# Altium PCB PCB_ESP32-IOT-Shield-copy_2025-10-18.pcbdoc
Units mm, origin at the board's own origin, x right, y up, seen from the top; angles counter-clockwise.
Board outline 119.75 x 135.63 mm, 2 copper layers (Top Layer, Bottom Layer); 39 components, 65 nets, 134 pads, 0 vias.
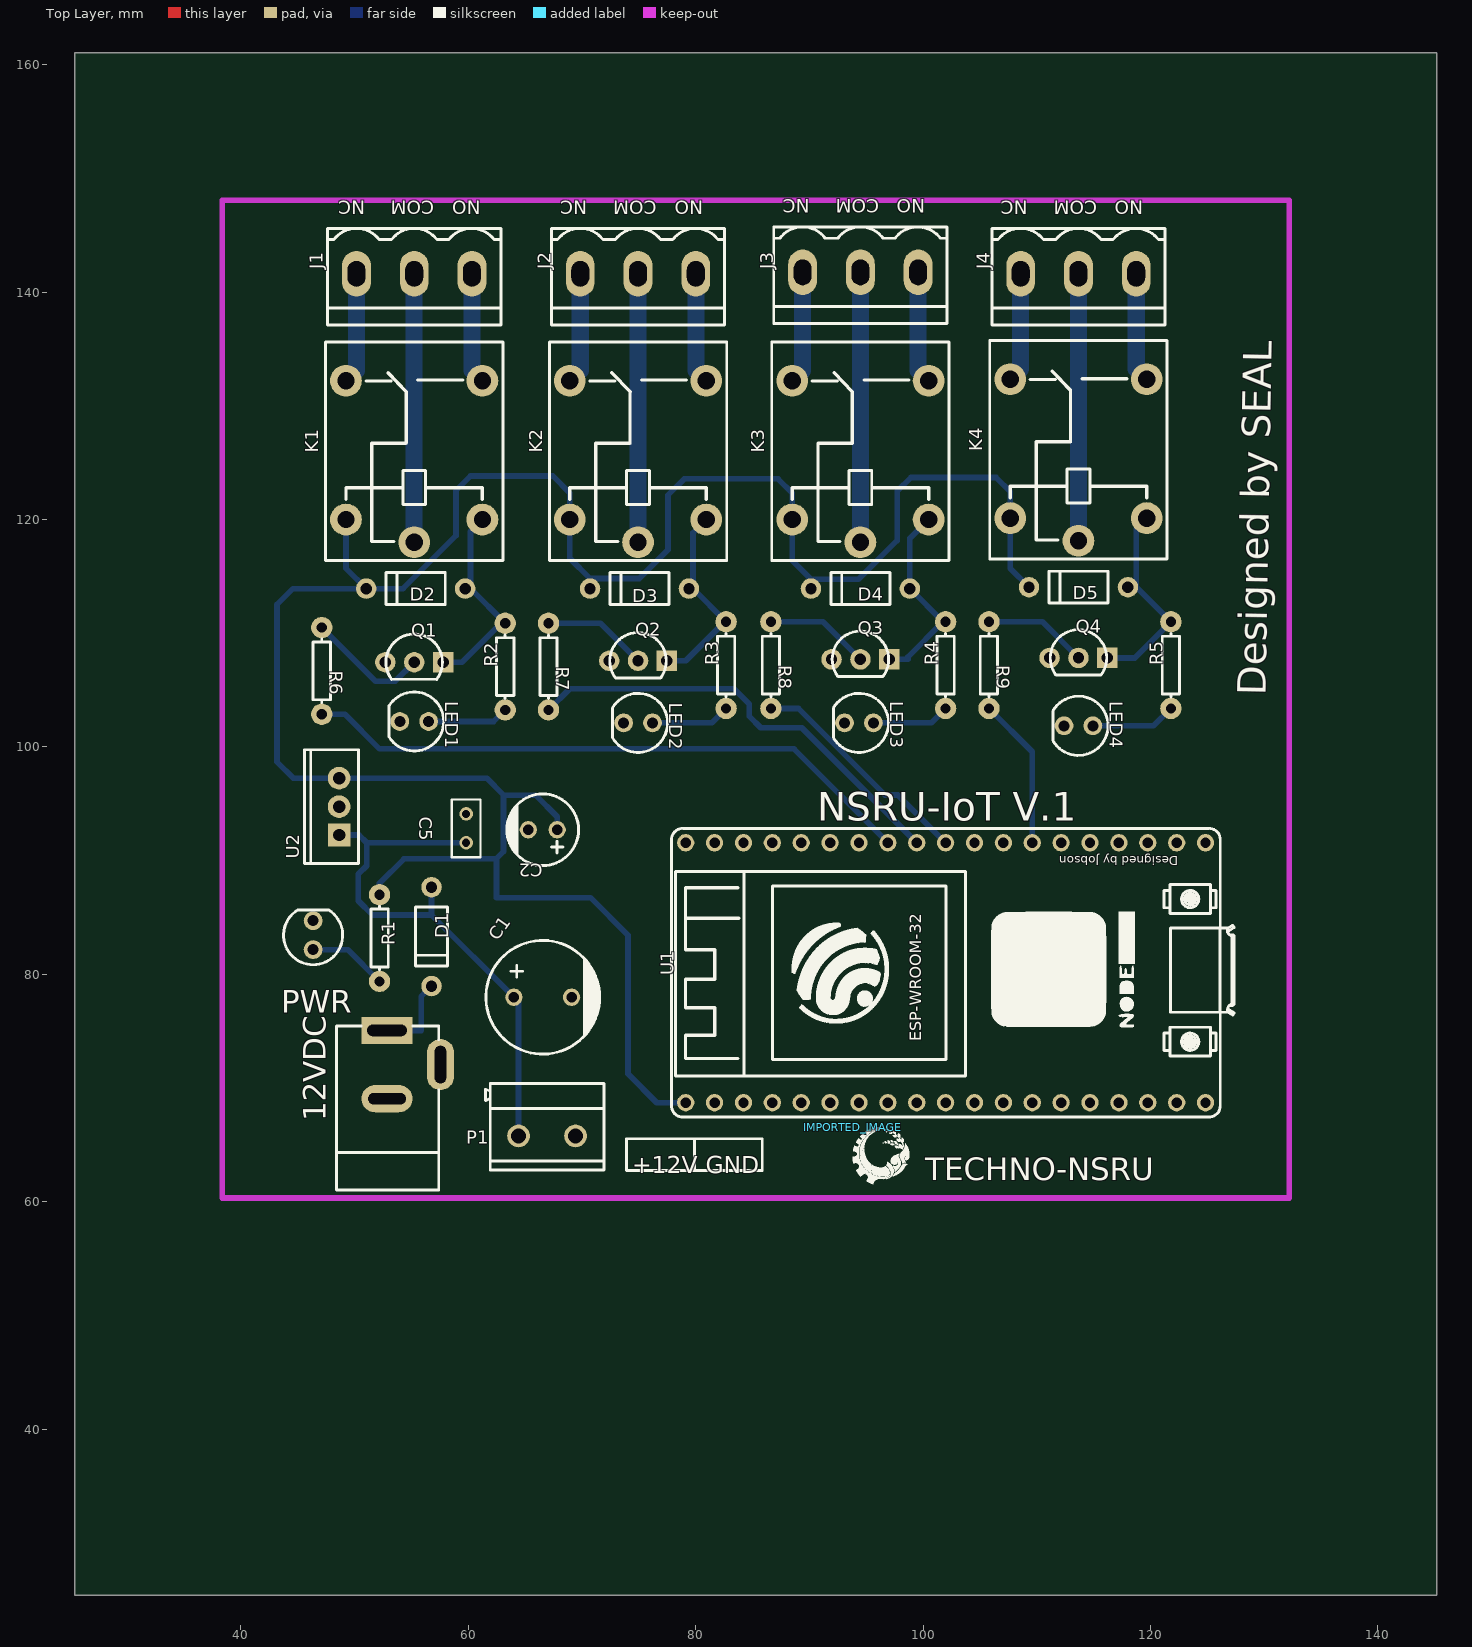
[diagram p0: Top Layer view]
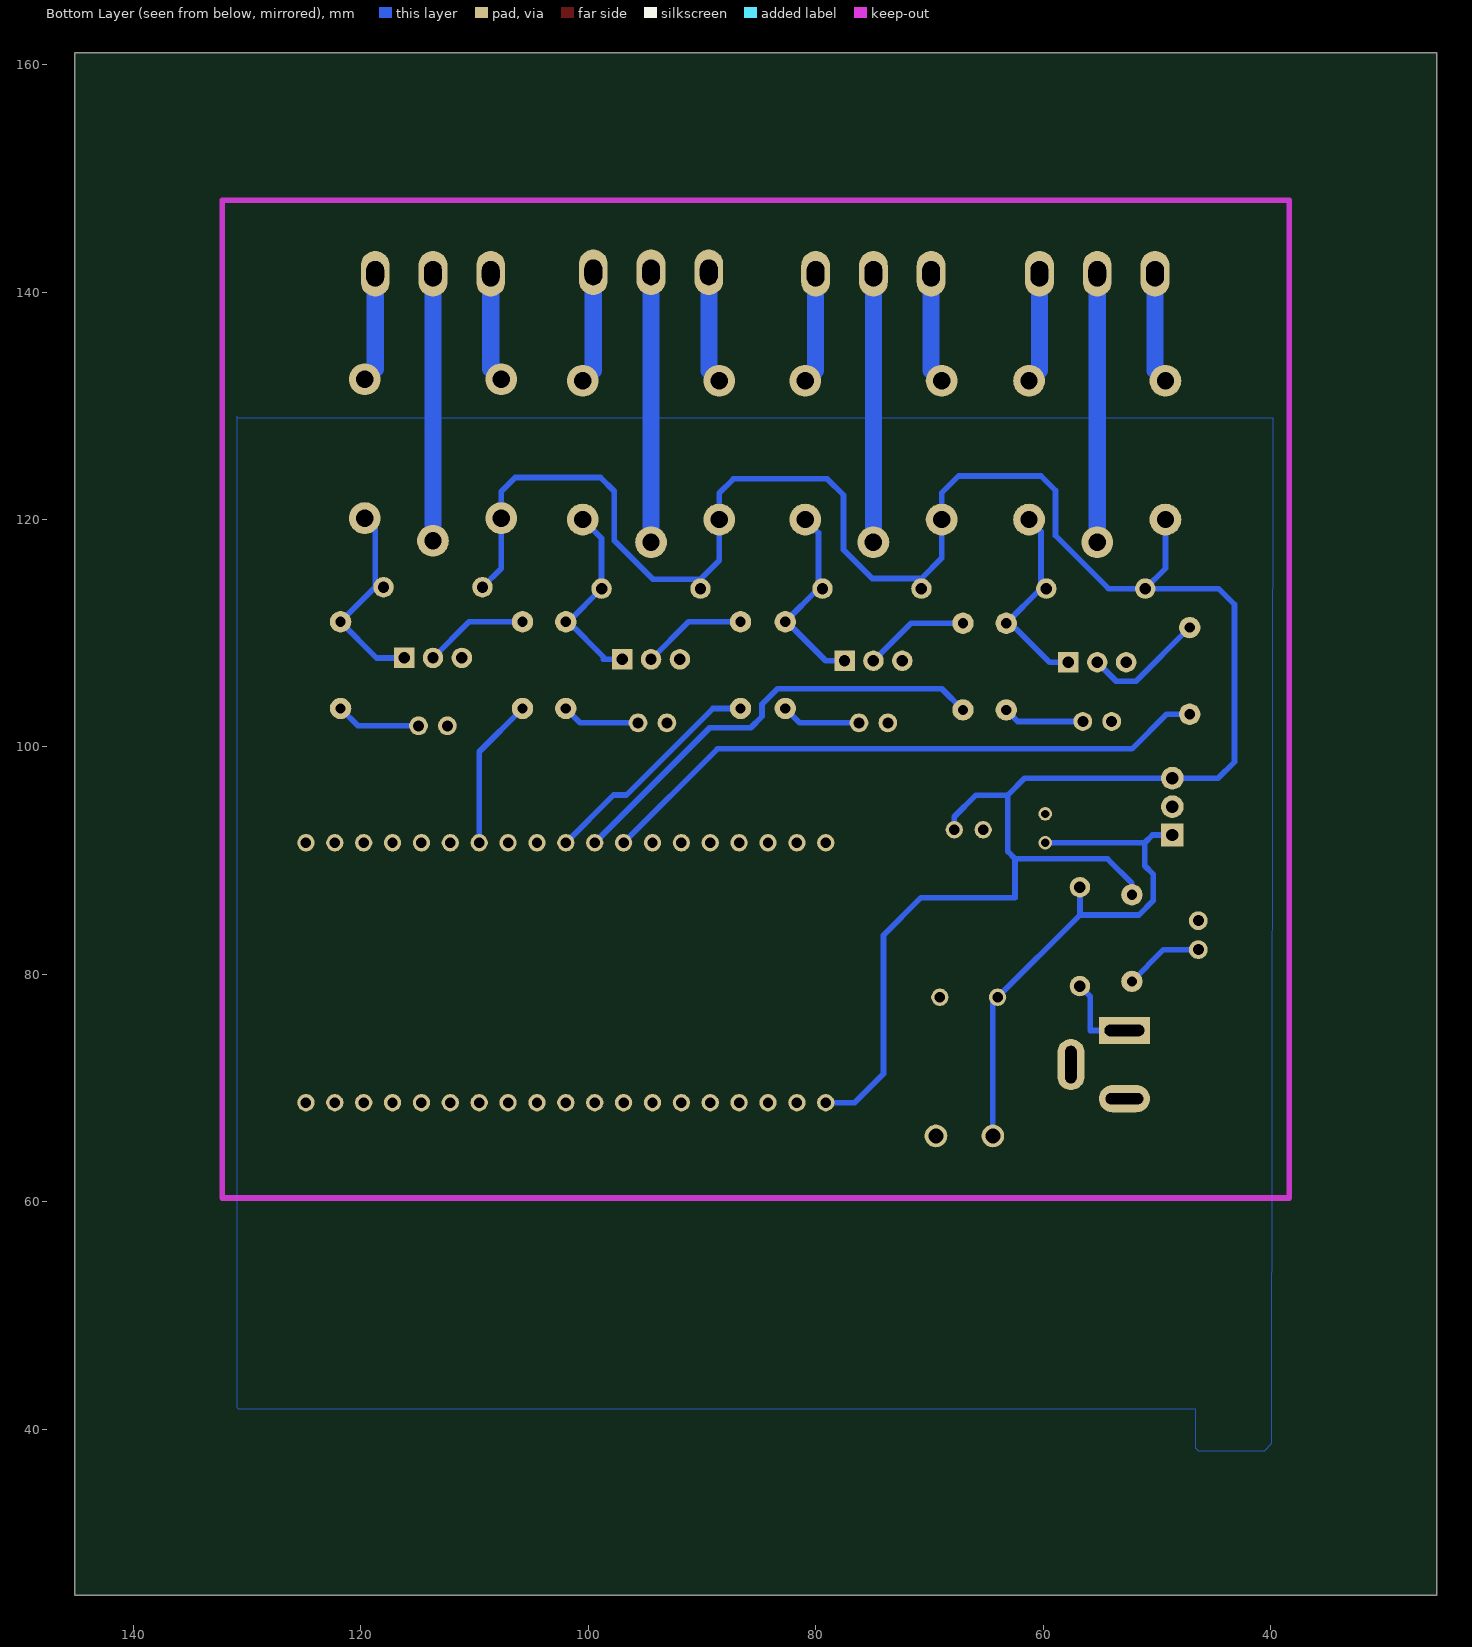
[diagram p1: Bottom Layer view, seen from below]

## Layer stack, top to bottom
Top Layer: signal copper (thickness not stored)
Dielectric: dielectric 0.32, FR-4, Dk 4.8
Bottom Layer: signal copper (thickness not stored)

## Board outline
145.153,25.4 25.4,25.4 25.4,161.032 145.153,161.032

## Components (designator, comment, footprint, x,y, rotation, side; value= is the part's Value field where it differs from the comment)
12VDC "POWER-JACK" JACK-POWER-SUPPLY 52.193,69.215 r270 top
C1 "2200u" CAP-D10.0×F5.0 66.544,77.978 r0 top
C2 "1u" CAP-D6.3×F2.5 66.544,92.71 r180 top
C5 "100n" RAD-0.1 59.813,92.837 r270 top
D1 "1N4007" DO-41_BD2.4-L4.7-P8.70-D0.9-RD 56.765,83.312 r90 top
D2 "1N4007" DO-41_BD2.4-L4.7-P8.70-D0.9-RD 55.368,113.919 r0 top
D3 "1N4007" DO-41_BD2.4-L4.7-P8.70-D0.9-RD 75.053,113.919 r0 top
D4 "1N4007" DO-41_BD2.4-L4.7-P8.70-D0.9-RD 94.484,113.919 r0 top
D5 "1N4007" DO-41_BD2.4-L4.7-P8.70-D0.9-RD 113.661,114.046 r0 top
IMPORTED_IMAGE "IMPORTED_IMAGE" IMPORTED_IMAGE 93.795,66.55 r0 top
J1 "SCREW TERMINAL 3P" SCREW_TERMINAL_5.08MM_3P 55.241,141.605 r180 top
J2 "SCREW TERMINAL 3P" SCREW_TERMINAL_5.08MM_3P 74.926,141.605 r180 top
J3 "SCREW TERMINAL 3P" SCREW_TERMINAL_5.08MM_3P 94.484,141.732 r180 top
J4 "SCREW TERMINAL 3P" SCREW_TERMINAL_5.08MM_3P 113.661,141.605 r180 top
K1 "SRD-12VDC-SD-C" RELAY-TH_SRD-XXVDC-SD-C 55.241,125.095 r90 top
K2 "SRD-12VDC-SD-C" RELAY-TH_SRD-XXVDC-SD-C 74.926,125.095 r90 top
K3 "SRD-12VDC-SD-C" RELAY-TH_SRD-XXVDC-SD-C 94.484,125.095 r90 top
K4 "SRD-12VDC-SD-C" RELAY-TH_SRD-XXVDC-SD-C 113.661,125.222 r90 top
LED1 "LED-TH-5mm_R" LED-TH_BD5.0_RED 55.241,102.235 r270 top
LED2 "LED-TH-5mm_R" LED-TH_BD5.0_RED 74.926,102.108 r270 top
LED3 "LED-TH-5mm_R" LED-TH_BD5.0_RED 94.357,102.108 r270 top
LED4 "LED-TH-5mm_R" LED-TH_BD5.0_RED 113.661,101.854 r270 top
P1 "CONN-TH_2P-P5.00" CONN-TH_2P-P5.00 66.925,65.786 r0 top
PWR "LED-TH-5mm_G" LED-TH_BD5.0_GREEN 46.351,83.439 r180 top
Q1 "2N2222A" TO-92-3_L4.8-W3.7-P2.54-R 55.241,107.442 r0 top
Q2 "2N2222A" TO-92-3_L4.8-W3.7-P2.54-R 74.926,107.569 r0 top
Q3 "2N2222A" TO-92-3_L4.8-W3.7-P2.54-R 94.484,107.696 r0 top
Q4 "2N2222A" TO-92-3_L4.8-W3.7-P2.54-R 113.661,107.823 r0 top
R1 "150" R_AXIAL-0.3 52.193,83.185 r90 top
R2 "220" R_AXIAL-0.3 63.242,107.061 r90 top
R3 "220" R_AXIAL-0.3 82.673,107.188 r90 top
R4 "220" R_AXIAL-0.3 101.977,107.188 r90 top
R5 "220" R_AXIAL-0.3 121.789,107.188 r90 top
R6 "1k" R_AXIAL-0.3 47.113,106.68 r270 top
R7 "1k" R_AXIAL-0.3 67.052,107.061 r270 top
R8 "1k" R_AXIAL-0.3 86.61,107.188 r270 top
R9 "1k" R_AXIAL-0.3 105.787,107.188 r270 top
U1 "NODEMCU-32SLUA" COMM-TH_NODEMCU-32SLUA 101.977,80.137 r90 top
U2 "LM7805CV" LM7805CV 48.637,94.742 r90 top

## Footprints (in the part's own frame and the unit in brackets; to place one, negate y for a bottom-side part, rotate by r counter-clockwise, add the part's x,y. Pads: shape width x height; smd on the part's side, far side on the other; paste and mask are expansions set on the pad)
CAP-D6.3×F2.5 [mil]
  round 60 hole 36 paste+0 mask+4: 1(-50,0) 2(50,0)
  silkscreen extent -124,-124 125,124
CAP-D10.0×F5.0 [mil]
  round 60 hole 36 paste+0 mask+4: 1(-100,0) 2(100,0)
  silkscreen extent -197,-197 200,197
COMM-TH_NODEMCU-32SLUA [mil]
  round 60 hole 36 paste+0 mask+1.97: 1(-450,-900) 2(-450,-800) 3(-450,-700) 4(-450,-600) 5(-450,-500) 6(-450,-400) 7(-450,-300) 8(-450,-200) 9(-450,-100) 10(-450,0) 11(-450,100) 12(-450,200) 13(-450,300) 14(-450,400) 15(-450,500) 16(-450,600) 17(-450,700) 18(-450,800) 19(-450,900) 20(450,-900) 21(450,-800) 22(450,-700) 23(450,-600) 24(450,-500) 25(450,-400) 26(450,-300) 27(450,-200) 28(450,-100) 29(450,0) 30(450,100) 31(450,200) 32(450,300) 33(450,400) 34(450,500) 35(450,600) 36(450,700) 37(450,800) 38(450,900)
  silkscreen extent -500,-999 500,949
CONN-TH_2P-P5.00 [mm]
  round 2 hole 1.3 paste+0 mask+0.051: 1(-2.504,0) 2(2.504,0)
  silkscreen extent -5.4,-3 5,4.6
DO-41_BD2.4-L4.7-P8.70-D0.9-RD [mm]
  round 1.8 hole 1 paste+0 mask+0.051: 1(-4.35,0) 2(4.35,0)
  silkscreen extent -2.6,-1.4 2.6,1.4
IMPORTED_IMAGE [mm]
  silkscreen extent 0,-5 5,0
JACK-POWER-SUPPLY [mm]
  rect 2.4x4.5 hole 1 slot 3.5 at 90 deg paste+0 mask+0.051: 1(-5.843,0.656)
  oval 2.4x4.5 hole 1 slot 3.3 at 90 deg paste+0 mask+0.051: 2(0.157,0.656)
  oval 4.5x2.4 hole 1 slot 3.3 at 0 deg paste+0 mask+0.051: 3(-2.843,5.359)
  silkscreen extent -6.22,-3.8 8.19,5.21
LED-TH_BD5.0_GREEN [mil]
  round 65 hole 38 paste+0 mask+2: 1(0,50) 2(0,-50)
  silkscreen extent -102,-88 102,102
LED-TH_BD5.0_RED [mil]
  round 65 hole 38 paste+0 mask+2: 1(0,50) 2(0,-50)
  silkscreen extent -102,-88 102,102
LM7805CV [mm]
  rect 2x2 hole 1.082 paste+0 mask+0.051: 1(-2.5,0)
  round 2 hole 1.082 paste+0 mask+0.051: 2(0,0) 3(2.5,0)
  silkscreen extent -5,-1.69 5,3.04
R_AXIAL-0.3 [mil]
  round 74 hole 35.4 paste+0 mask+2: 1(-150,0) 2(150,0)
  silkscreen extent -110,-30 110,30
RAD-0.1 [mil]
  round 47 hole 28 paste+0 mask+2: 1(-50,0) 2(50,0)
  silkscreen extent -100,-50 100,50
RELAY-TH_SRD-XXVDC-SD-C [mil]
  round 110 hole 60 paste+0 mask+2: 1(-200.86,-236.2) 2(279.56,-236.2) 3(279.54,236.2) 4(-200.86,236.2) 5(-279.56,0)
  silkscreen extent -342,-307 413,307
SCREW_TERMINAL_5.08MM_3P [mm]
  oval 2.54x4 hole 1.55 slot 2.245 at 90 deg paste+0 mask+0.102: 1(-5.08,0) 2(0,0) 3(5.08,0)
  silkscreen extent -7.62,-4 7.62,4.5
TO-92-3_L4.8-W3.7-P2.54-R [mm]
  rect 1.8x1.8 hole 1 paste+0 mask+0.051: 1(2.54,0)
  round 1.8 hole 1 paste+0 mask+0.051: 2(0,0) 3(-2.54,0)
  silkscreen extent -2.48,-1.5 2.48,2.48

## Nets (pads, with @x,y where several pads share a name; then routed paths per layer and width w, separated by ;. In a path a pad name is that pad's centre, name@x,y a point inside that pad or via, vN(x,y) a via of type N, cw(c..) or ccw(c..) an arc to the next point about the centre after c; other vN are vias at no path point)
5V: C2.1 D2.1 D3.1 D4.1 D5.1 K1.4 K2.4 K3.4 K4.4 R1.2 U1.19 U2.3 | length 214.6
  Bottom Layer w0.5: K1.4 49.242,115.695 D2.1 ; R1.2 52.193,88.011 54.334,90.152 60.517,90.152 ; 63.1,94.056 63.1,95.758 65.909,95.758 67.814,93.853 C2.1 ; K2.4 68.927,122.331 67.433,123.825 60.194,123.825 58.909,122.54 58.909,118.575 54.253,113.919 51.017,113.919 44.573,113.919 43.176,112.522 43.176,98.679 44.614,97.241 U2.3 61.632,97.241 63.1,95.773 63.1,90.805 62.447,90.152 60.517,90.152 ; K2.4 68.927,116.584 70.703,114.807 D3.1 ; D3.1@70.702,114.808 75.03,114.808 77.56,117.335 77.56,122.141 78.99,123.571 87.245,123.571 88.485,122.331 K3.4 ; U1.19 76.577,68.707 74.037,71.247 74.037,83.439 70.735,86.741 62.48,86.741 62.48,90.152 60.517,90.152 ; K3.4 88.485,116.393 90.134,114.744 D4.1 ; D4.1@90.133,114.745 94.321,114.745 97.712,118.135 97.712,122.481 98.929,123.698 106.422,123.698 107.662,122.458 K4.4 ; K4.4 107.662,115.695 D5.1
12V: C1.1 C5.2 D1.2 P1.1 U2.1 | length 48.4
  Bottom Layer w0.5: U2.1 50.388,92.242 51.063,91.567 ; D1.2 56.765,85.217 ; C5.2 51.063,91.567 ; P1.1@64.421,66.294 64.421,77.561 C1.1 56.765,85.217 ; 51.063,91.567 51.063,89.548 50.324,88.809 50.324,86.472 51.578,85.217 56.765,85.217
12VDC_3: 12VDC.3
D4: R9.2 U1.26 | length 13.4
  Bottom Layer w0.5: R9.2 109.597,99.568 U1.26
D5: R8.2 U1.29 | length 20.3
  Bottom Layer w0.5: R8.2 89.043,103.378 96.65,95.771 97.773,95.771 U1.29
D16: U1.27
D17: U1.28
D18: R7.2 U1.30 | length 39.4
  Bottom Layer w0.5: R7.2 68.916,105.115 83.353,105.115 84.718,103.75 84.718,102.68 85.712,101.686 89.318,101.686 U1.30
D19: R6.2 U1.31 | length 54.5
  Bottom Layer w0.5: R6.2 49.145,102.87 52.193,99.822 88.642,99.822 U1.31
GND: 12VDC.2 C1.2 C2.2 C5.1 LED1.2 LED2.2 LED3.2 LED4.2 P1.2 PWR.2 Q1.3 Q2.3 Q3.3 Q4.3 U1.14 U1.32 U1.38 U2.2
J2_1: J2.1 K2.2 | length 9.8
  Bottom Layer w1.5: J2.1 80.006,133.115 K2.2
J2_2: J2.2 K2.5 | length 23.6
  Bottom Layer w1.5: K2.5 J2.2
J2_3: J2.3 K2.3 | length 9.8
  Bottom Layer w1.5: K2.3 69.846,133.115 J2.3
J3_1: J3.1 K3.2 | length 9.9
  Bottom Layer w1.5: J3.1 99.564,133.115 K3.2
J3_2: J3.2 K3.5 | length 23.7
  Bottom Layer w1.5: K3.5 J3.2
J3_3: J3.3 K3.3 | length 9.9
  Bottom Layer w1.5: K3.3 89.404,133.115 J3.3
J4_1: J4.1 K4.2 | length 9.7
  Bottom Layer w1.5: J4.1 118.741,133.242 K4.2
J4_2: J4.2 K4.5 | length 23.5
  Bottom Layer w1.5: K4.5 J4.2
J4_3: J4.3 K4.3 | length 9.7
  Bottom Layer w1.5: K4.3 108.581,133.242 J4.3
K1_1: D2.2 K1.1 Q1.1 R2.2 | length 18.2
  Bottom Layer w0.5: Q1.1 59.431,107.442 62.86,110.871 R2.2 D2.2@60.194,113.919 ; D2.2 D2.2@60.194,113.919 ; K1.1 60.194,118.947 D2.2@60.194,113.919
K1_2: J1.1 K1.2 | length 9.8
  Bottom Layer w1.5: J1.1 60.321,133.115 K1.2
K1_3: J1.3 K1.3 | length 9.8
  Bottom Layer w1.5: K1.3 50.161,133.115 J1.3
K1_5: J1.2 K1.5 | length 23.6
  Bottom Layer w1.5: K1.5 J1.2
LED1_1: LED1.1 R2.1 | length 7.2
  Bottom Layer w0.5: LED1.1 62.226,102.235 R2.1
LED2_1: LED2.1 R3.1 | length 7
  Bottom Layer w0.5: LED2.1 81.403,102.108 R3.1
LED3_1: LED3.1 R4.1 | length 6.9
  Bottom Layer w0.5: LED3.1 100.707,102.108 R4.1
LED4_1: LED4.1 R5.1 | length 7.5
  Bottom Layer w0.5: LED4.1 120.265,101.854 R5.1
LED5_1: PWR.1 R1.1 | length 7
  Bottom Layer w0.5: PWR.1 49.399,82.169 R1.1
Q1_2: Q1.2 R6.1 | length 10.8
  Bottom Layer w0.5: R6.1 51.837,105.766 53.565,105.766 Q1.2
Q2_1: D3.2 K2.1 Q2.1 R3.2 | length 17.7
  Bottom Layer w0.5: Q2.1 79.116,107.569 82.545,110.998 R3.2 D3.2@79.752,113.919 ; D3.2 D3.2@79.752,113.919 ; K2.1 79.752,118.82 D3.2@79.752,113.919
Q2_2: Q2.2 R7.1 | length 9.2
  Bottom Layer w0.5: R7.1 71.624,110.871 Q2.2
Q3_1: D4.2 K3.1 Q3.1 R4.2 | length 17.3
  Bottom Layer w0.5: Q3.1 98.674,107.696 98.674,107.917 R4.2@101.755,110.998 ; K3.1 98.834,118.344 D4.2 R4.2@101.755,110.998 ; R4.2 R4.2@101.755,110.998
Q3_2: Q3.2 R8.1 | length 9.2
  Bottom Layer w0.5: R8.1 91.182,110.998 Q3.2
Q4_1: D5.2 K4.1 Q4.1 R5.2 | length 18.4
  Bottom Layer w0.5: Q4.1 118.614,107.823 R5.2 D5.2@118.741,114.046 ; D5.2 D5.2@118.741,114.046 ; K4.1 118.741,119.201 D5.2@118.741,114.046
Q4_2: Q4.2 R9.1 | length 9.2
  Bottom Layer w0.5: R9.1 110.486,110.998 Q4.2
S$7169: 
U1_1: U1.1
U1_2: U1.2
U1_3: U1.3
U1_4: U1.4
U1_5: U1.5
U1_6: U1.6
U1_7: U1.7
U1_8: U1.8
U1_9: U1.9
U1_10: U1.10
U1_11: U1.11
U1_12: U1.12
U1_13: U1.13
U1_15: U1.15
U1_16: U1.16
U1_17: U1.17
U1_18: U1.18
U1_20: U1.20
U1_21: U1.21
U1_22: U1.22
U1_23: U1.23
U1_24: U1.24
U1_25: U1.25
U1_33: U1.33
U1_34: U1.34
U1_35: U1.35
U1_36: U1.36
U1_37: U1.37
VCC: 12VDC.1 D1.1 | length 7.3
  Bottom Layer w0.5: 12VDC.1 55.85,75.058 55.85,78.047 D1.1

## Polygon pours and split planes (outlines as drawn)
GND on Bottom Layer (solid): 39.747,128.905 130.806,128.905 130.933,129.032 130.933,41.91 130.806,41.783 46.605,41.783 46.605,38.354 46.351,38.1 40.509,38.1 39.874,38.735

## Silkscreen, mask and mechanical layers (free items; w line width, h text height)
Top Overlay:
  lines w0.254: 79.879,62.738 79.879,65.532 ; 79.879,62.738 73.91,62.738 73.91,65.532 79.879,65.532 ; 79.879,62.738 85.848,62.738 85.848,65.532 79.879,65.532 ; 79.879,62.738 79.879,65.532
  text "NC" at 90.039,148.174 h1.2 r180
  text "COM" at 96.135,148.174 h1.2 r180
  text "NO" at 100.199,148.174 h1.2 r180
  text "NC" at 50.923,148.047 h1.2 r180
  text "COM" at 57.019,148.047 h1.2 r180
  text "NO" at 61.083,148.047 h1.2 r180
  text "NC" at 70.481,148.047 h1.2 r180
  text "COM" at 76.577,148.047 h1.2 r180
  text "NO" at 80.641,148.047 h1.2 r180
  text "NC" at 109.216,148.047 h1.2 r180
  text "COM" at 115.312,148.047 h1.2 r180
  text "NO" at 119.376,148.047 h1.2 r180
  text "Designed by SEAL" at 130.151,104.499 h2.5 r89
  text "NSRU-IoT V.1" at 90.674,93.492 h2.5
  text "+12V" at 74.418,62.496 h1.5
  text "GND" at 80.895,62.496 h1.5
  text "TECHNO-NSRU" at 100.199,61.865 h2

## Text inside footprints (layer, text, board x,y; h text height)
U1: Top Overlay "ESP-WROOM-32" at 99.843,74.092 h1.02 r90; Top Overlay "Designed by Jobson" at 122.419,90.391 h0.76 r180